# Altium PCB Main_Block.PcbDoc (part 3 of 3)
Units mil, origin at the board's own origin, x right, y up, seen from the top; angles counter-clockwise.
Board outline 1101.34 x 1573.78 mil, 8 copper layers (Top Layer - Signal, L2 - GND, L3-Signal, Layer 3 - Signal, L5 PWR, L6-Signal, L7-GND, Bottom Layer - Signal), stack 62.48 mil thick; 156 components, 137 nets, 799 pads, 431 vias.
Unrouted connection lines stored in the file: 382.
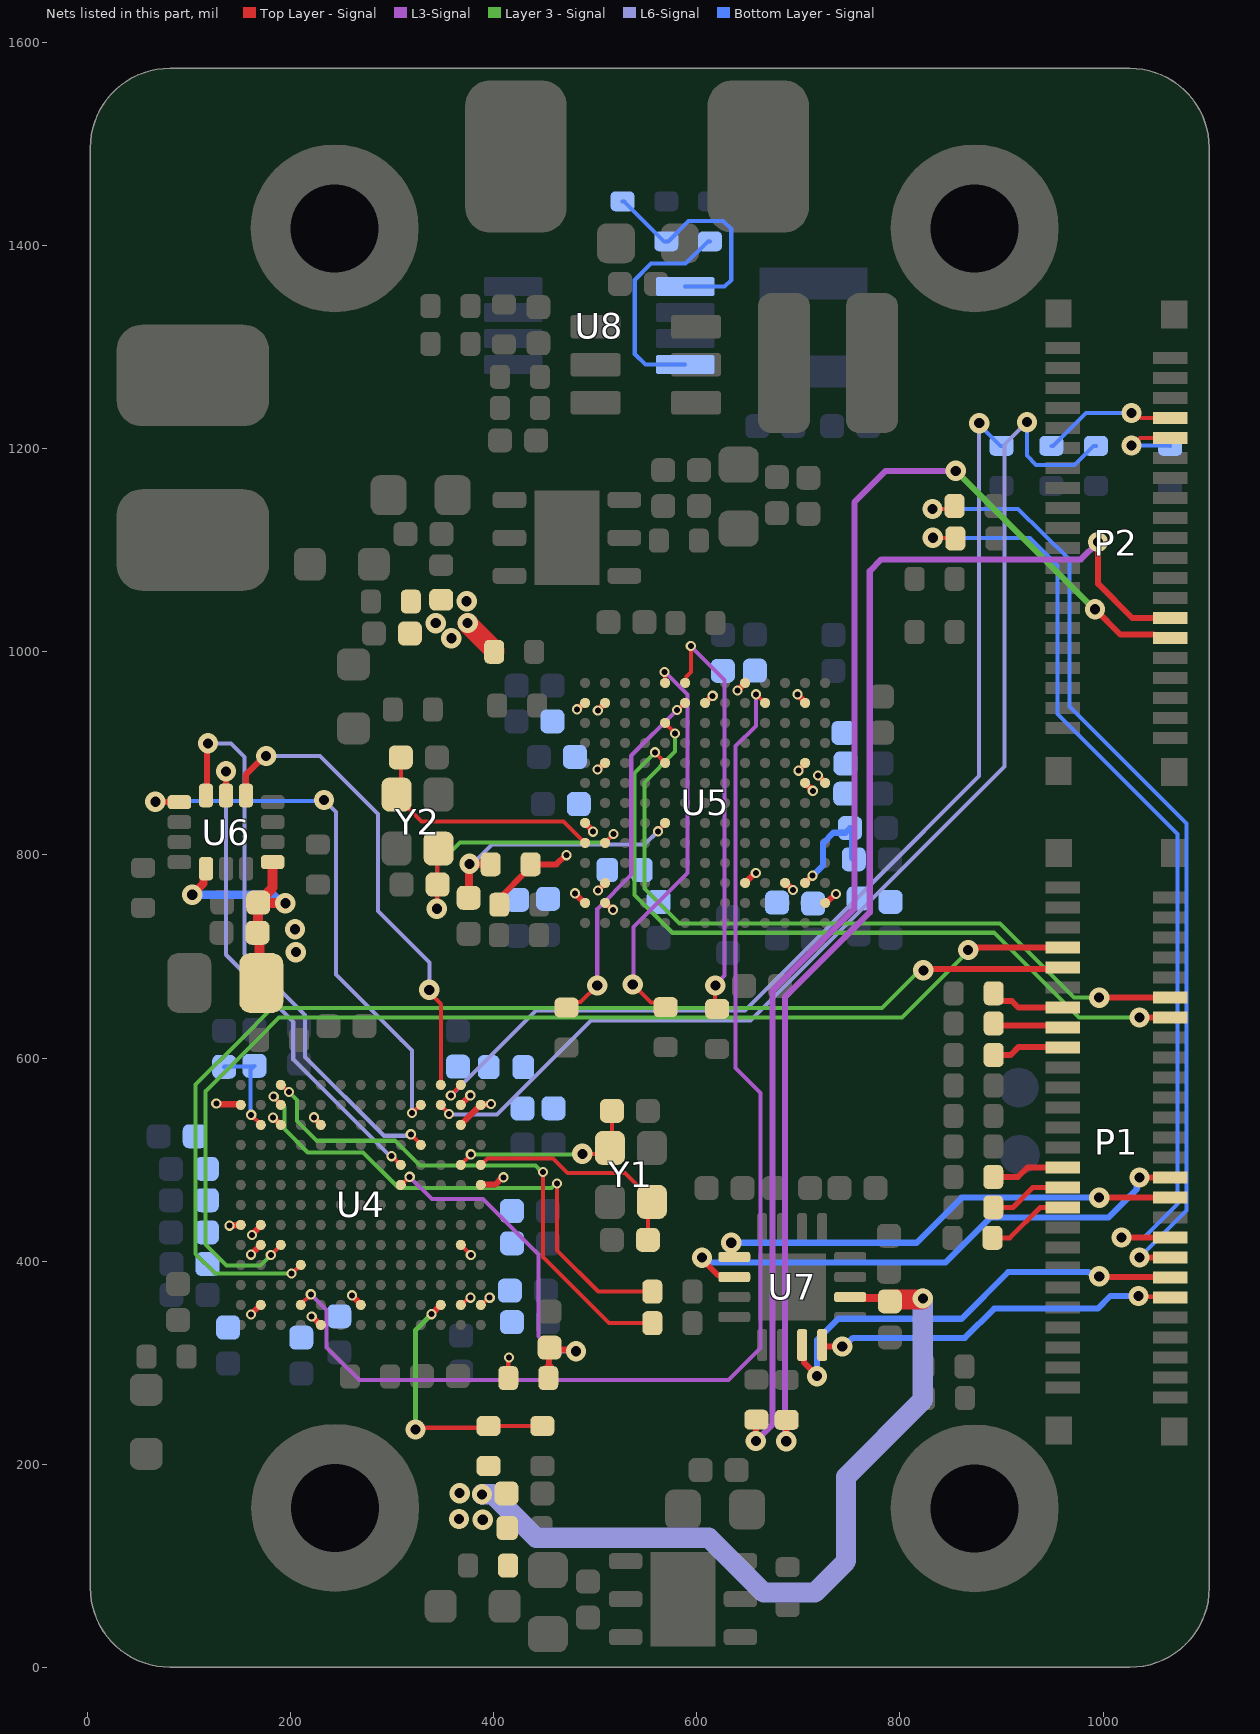
[diagram p9: the nets of this part, all layers, seen from the top]

## Via types
v1: diameter 20, hole 10, Top Layer - Signal to Bottom Layer - Signal, tented both sides, 285 vias
v2: diameter 10, hole 5.91, Top Layer - Signal to Bottom Layer - Signal, tented both sides, 145 vias
v3: diameter 19.68, hole 7.87, Top Layer - Signal to Bottom Layer - Signal, tented both sides, 1 vias

## Nets (pads, with @x,y where several pads share a name; then routed paths per layer and width w, separated by ;. In a path a pad name is that pad's centre, name@x,y a point inside that pad or via, vN(x,y) a via of type N, cw(c..) or ccw(c..) an arc to the next point about the centre after c; other vN are vias at no path point) (continued)
NetR47_1: R47.1 R48.2 U4.B3 | length 259.2
  Top Layer - Signal w4: v1(323.24,234.48) 325,236.24 393.24,236.24 R47.1@395,238 R48.2@448,238
  Top Layer - Signal w6: v2(339,348) U4.B3@348.1,357.15
  Layer 3 - Signal w5: v1(323.24,234.48) 323.24,332.24 v2(339,348)
NetR49_1: R49.1 U8.8 | length 216.7
  Bottom Layer - Signal w4: U8.8@588.65,1282.61 549.39,1282.61 539,1293 539,1366 555,1382 589,1382 611,1404 R49.1@613,1404
NetR50_1: R50.1 R51.2 U8.5 | length 233
  Bottom Layer - Signal w4: R51.2@527,1443.37 528.63,1443.37 568,1404 R50.1@570,1404 571.97,1404 591.97,1424 626,1424 634,1416 634,1366 627.39,1359.39 U8.5@588.65,1359.39
NRST_MCU1: C24.2 R21.1 U4.H5 | length 351.8
  Top Layer - Signal w4: U4.H5@308.73,475.26 309.14,475.26 317.1,483.23 v2(317.51,483.23)
  Top Layer - Signal w6: R21.1@454.53,295.2 454.53,314.45 C24.2@455.19,315.11 457,313.29 479.28,313.29 v1(481.09,311.48)
  Top Layer - Signal w10: R21.1@453.88,285.11 454.53,285.77 R21.1@454.53,295.2
  L3-Signal w4: v2(317.51,483.23) 339.51,461.23 389.66,461.23 444.29,406.61 444.29,326.29 459.09,311.48 v1(481.09,311.48)
NRST_MCU2: C51.2 R33.1 U5.H5 | length 264.5
  Top Layer - Signal w4: v2(561.75,823.33) 561.75,823.87 568.91,831.03 U5.H5@568.91,831.57
  Top Layer - Signal w8: C51.2@375.47,757.85 375.94,758.32 375.94,790.72 v1(376.41,791.2) 396.77,791.2 R33.1@397.15,790.82
  L6-Signal w4: v1(376.41,791.2) 379.47,791.2 398.52,810.24 548.66,810.24 v2(561.75,823.33)
NX_CAN_H: P2.33 R26.2 | length 132.5
  Top Layer - Signal w4: v1(1028,1235) 1032,1235 1037.06,1229.94 P2.33@1066,1229.94
  Bottom Layer - Signal w4: R26.2@949,1202.69 950.69,1202.69 983,1235 v1(1028,1235)
NX_CAN_L: P2.31 R25.2 | length 79.1
  Top Layer - Signal w4: v1(1028,1203) 1029,1203 1036.26,1210.26 P2.31@1066,1210.26
  Bottom Layer - Signal w4: v1(1028,1203) 1028.16,1202.84 1065.84,1202.84 R25.2@1066,1202.69
PH0_MCU1: C41.1 U4.J2 Y1.1 | length 217.5
  Top Layer - Signal w4: U4.J2@367.78,494.94 367.78,495.25 377.62,505.09 v2(377.62,505.39) ; v1(487.47,505.83) 502.17,505.83 504.63,508.29 504.63,523.55 514.01,523.55 516.47,526.01 516.47,535.39 ; Y1.1@514.52,511.68 516.47,513.64 516.47,535.39 ; C41.1@516.47,548.11 516.47,535.39
  Layer 3 - Signal w4: v2(377.62,505.39) 377.7,505.31 463.47,505.31 486.95,505.31 v1(487.47,505.83)
PH0_MCU2: C68.1 U5.J2 Y2.1 | length 301.1
  Top Layer - Signal w4: v1(344.19,747.11) 344.6,747.51 344.6,770.48 C68.1@345,770.88 345,805.36 Y2.1@345.95,806.31 ; U5.J2@509.86,811.89 509.86,812.29 517.92,820.34 v2(517.92,820.74)
  Layer 3 - Signal w4: v1(344.19,747.11) 344.19,789.34 367.2,812.35 427.4,812.35 509.52,812.35 v2(517.92,820.74)
PH1_MCU1: C27.1 U4.J1 Y1.3 | length 229
  Top Layer - Signal w4: U4.J1@387.47,494.94 387.74,494.94 394.12,501.33 424,501.33 458.67,501.33 473.03,486.97 529.39,486.97 555.86,460.5 Y1.3@555.86,458.53 551.91,454.58 C27.1@551.91,421.11
PH1_MCU2: C54.1 U5.J1 Y2.3 | length 244.8
  Top Layer - Signal w4: C54.1@308.76,896.11 308.76,861.63 304.62,857.49 329,833.11 468.95,833.11 U5.J1@490.17,811.89
PWM: P1.15 R41.1 | length 962.6
  Top Layer - Signal w4: v1(831.99,1140.52) 850.88,1140.52 R41.1@853.78,1143.41
  Top Layer - Signal w6: v1(1035.72,403.72) P1.15@1066.1,403.73
  Bottom Layer - Signal w4: v1(831.99,1140.52) 916.04,1140.52 965.81,1091.85 ; 965.83,1091.83 967,1090.66 967,946 1082.19,830.81 1082.19,450.19 v1(1035.72,403.72)
RS232_GB_RX: P1.13 U7.11 | length 450
  Top Layer - Signal w6: U7.11@703.78,317.72 705.7,315.8 705.7,300.28 718.34,287.64 v1(718.34,287.03) ; v1(996.23,385.25) 996.83,384.65 1065.49,384.65 P1.13@1066.1,384.04
  Bottom Layer - Signal w6: v1(718.34,287.03) 718.34,322.44 739.45,343.55 860.63,343.55 906.62,389.54 985.71,389.54 987.33,387.93 993.55,387.93 v1(996.23,385.25)
RS232_GB_TX: P1.11 U7.12 | length 364.6
  Top Layer - Signal w4: v1(1034.82,365.92) 1035.59,365.14 1065.32,365.14 P1.11@1066.1,364.36
  Top Layer - Signal w6: U7.12@723.47,317.72 725.09,316.11 v1(743.19,316.11)
  Bottom Layer - Signal w6: v1(743.19,316.11) 745.14,316.11 753.71,324.67 863.75,324.67 892.61,353.53 994.79,353.53 1007.18,365.92 v1(1034.82,365.92)
RS232_RX: P1.23 U7.6 | length 543
  Top Layer - Signal w6: v1(605.11,403.68) 605.11,402.33 620.95,386.49 634.51,386.49 U7.6@636.69,384.32 ; v1@1035.73,482.46 P1.23@1066.1,482.47
  Bottom Layer - Signal w6: v1(605.11,403.68) 608.9,403.68 613.57,399 845,399 889,443 1005,443 1033.04,471.04 1033.04,479.78 v1(1035.72,482.46)
RS232_TX: P1.21 U7.5 | length 450.5
  Top Layer - Signal w6: P1.21@1066.1,462.78 P1.21@1066.1,462.78 v1@996.06,462.78 ; v1(996.02,462.75) v1@996.06,462.78
  Bottom Layer - Signal w6: v1(634.02,418.35) 816.35,418.35 860.75,462.75 v1(996.02,462.75)
RXD0: P2.13 R35.1 | length 1275.4
  Top Layer - Signal w6: v1(688.11,222.95) 688.34,223.18 688.34,243.75 R35.1@688.57,243.99 ; v1(995.02,1108) 995.02,1066.98 1028.91,1033.09 P2.13@1066,1033.09
  L3-Signal w6: v1(688.11,222.95) 686.83,224.22 686.83,660.04 770.26,743.47 770.26,1079.43 781.82,1091 978.02,1091 v1(995.02,1108)
SBUS: P1.17 R42.1 | length 950.6
  Top Layer - Signal w4: v1(832.41,1112.15) 853.9,1112.15 R42.1@854.57,1111.48
  Top Layer - Signal w6: v1(1018.08,423.43) P1.17@1066.1,423.41
  Bottom Layer - Signal w4: v1(832.41,1112.15) 927.85,1112.15 955,1085 955,938.89 1073.19,820.7 1073.19,456.52 1040.01,423.34 1018.17,423.34 v1(1018.08,423.43)
Shoulder_SCL_IMU1_H: P1.39 U5.E5 | length 740.7
  Top Layer - Signal w4: v2(559.07,901.07) 559.07,900.77 568.91,890.93 U5.E5@568.91,890.63
  Top Layer - Signal w6: v1(1035.73,639.94) P1.39@1066.1,639.95
  Layer 3 - Signal w4: v2(559.07,901.07) 538.86,880.86 538.86,760.49 575.9,723.45 770.28,723.45 892.54,723.45 976.05,639.94 v1(1035.73,639.94)
Shoulder_SDA_IMU1_H: P1.41 U5.C5 | length 741.6
  Top Layer - Signal w4: U5.C5@568.91,930 568.91,929.7 578.76,919.86 v2(578.76,919.55)
  Top Layer - Signal w6: v1(996.02,659.61) 996.06,659.65 P1.41@1066.1,659.65 P1.41@1066.13,659.69
  Layer 3 - Signal w4: v2(578.76,919.55) 578.76,901.68 548.57,871.49 548.57,767.13 583.24,732.45 770.28,732.45 898.43,732.45 971.27,659.61 v1(996.02,659.61)
"Shoulder_TIM1 CH1": P1.20 R11.2 | length 81.4
  Top Layer - Signal w5: R11.2@891.19,423.11 908.19,423.11 938.02,452.94 P1.20@960.19,452.94
"Shoulder_TIM1 CH2": P1.22 R12.2 | length 76.4
  Top Layer - Signal w5: R12.2@891.88,453.11 911.19,453.11 930.71,472.63 P1.22@960.19,472.63
"Shoulder_TIM1 CH3": P1.24 R13.2 | length 72.1
  Top Layer - Signal w6: R13.2@891.88,483.11 916.19,483.11 925.39,492.31 P1.24@960.19,492.31
SPI1_CS: U4.N3 U6.12 | length 477.1
  Top Layer - Signal w4: U6.12@156.4,858.53 U6.12@156.79,858.93 ; v1(336.79,667.22) 336.79,664.38 348.1,653.07 U4.N3@348.1,573.68
  Top Layer - Signal w6: U6.12@156.79,858.93 156.4,859.33 156.4,879.26 174.48,897.35 v1(176.21,897.35)
  Layer 3 - Signal w4: v1@176.21,894.88 v1(176.21,897.35) ; v1@336.46,667.22 v1(336.79,667.22)
  L6-Signal w4: v1(176.21,897.35) 229.23,897.35 286.09,840.49 286.09,744.87 336.79,694.16 v1(336.79,667.22)
SPI1_MISO: U4.M4 U6.1 | length 545
  Top Layer - Signal w4: v2(319.66,546.07) 320.07,546.07 326.77,552.77 U4.M4@326.77,553.68
  Top Layer - Signal w6: v1(67.19,852.35) 67.35,852.19 90.69,852.19 U6.1@90.84,852.03
  L6-Signal w4: v1(233.15,854.03) 245.09,842.09 245.09,682.15 309.68,617.57 319.66,607.59 v2(319.66,546.07)
  Bottom Layer - Signal w4: v1(67.19,852.35) 68.03,853.19 232.31,853.19 v1(233.15,854.03)
SPI1_MOSI: U4.K4 U6.14 | length 565.3
  Top Layer - Signal w4: U6.14@117.03,858.53 U6.14@117.11,858.61 ; v2(318.57,525.07) 318.57,524.77 328.06,515.28 U4.K4@328.06,513.79
  Top Layer - Signal w6: U6.14@117.11,858.61 118.01,859.52 118.01,908.86 v1(119,909.84)
  L6-Signal w4: v1(119,909.84) 141.44,909.84 154.71,896.58 154.71,702.59 214.63,642.67 214.63,617.57 214.63,601.33 292.32,523.64 314.45,523.64 314.74,523.93 317.42,523.93 v2(318.57,525.07)
SPI1_SCK: U4.J5 U6.13 | length 484.3
  Top Layer - Signal w4: U6.13@136.71,858.53 U6.13@136.95,858.77 ; v2(299.49,503.49) 299.83,503.49 308.44,494.89 U4.J5@309.14,494.89
  Top Layer - Signal w6: v1(136.68,882.29) 136.7,859.02 U6.13@136.95,858.77
  L6-Signal w4: v1(136.68,882.29) 136.87,882.09 136.87,701.78 202.88,635.77 202.88,617.57 202.88,598.54 297.93,503.49 v2(299.49,503.49)
SPI3_CS: U4.B10 U5.B10 | length 1201.5
  Top Layer - Signal w4: U4.B10@210.19,357.11 210.19,357.34 220.14,367.29 v2(220.14,367.59) ; v2(658.2,958.12) 658.55,958.12 666.98,949.68 U5.B10@667.34,949.68
  L3-Signal w4: v2(220.14,367.59) 235.58,352.16 235.58,315.3 245.88,305 267.86,283.02 631.08,283.02 662.75,314.69 662.75,565.82 638.19,590.38 638.19,689.26 638.19,907.11 658.2,927.12 v2(658.2,958.12)
SPI3_MISO: R28.2 U5.B6 | length 354
  Top Layer - Signal w4: R28.2@471.81,649.69 477.2,655.07 485.69,655.07 v1(502.09,671.48) ; v2(580.42,942.55) 580.94,942.55 588.08,949.68 U5.B6@588.6,949.68
  L3-Signal w4: v1(502.09,671.48) 502.09,689.26 502.09,746.67 535.52,780.09 535.52,897.64 v2(580.42,942.55)
SPI3_MOSI: R30.2 U5.A5 | length 392.2
  Top Layer - Signal w4: v1(537.09,672.48) 554.78,654.79 564.74,654.79 R30.2@569.39,650.15 ; v2(568.19,980.11) 568.55,979.75 568.55,969.73 U5.A5@568.91,969.37
  L3-Signal w4: v1(537.09,672.48) 537.74,673.12 537.74,689.26 537.74,729.06 590.92,782.24 590.92,957.81 568.62,980.11 v2(568.19,980.11)
SPI3_SCK: R27.2 U5.A6 | length 413.9
  Top Layer - Signal w4: U5.A6@588.6,969.37 589.75,970.52 589.75,975.76 594.16,980.18 v2(594.16,1005.5) ; v1(618.36,671.48) 618.14,671.27 618.14,650.53 618.09,650.48 R27.2@620.09,648.48
  L3-Signal w4: v2(594.16,1005.5) 594.16,1005.38 627.34,972.2 627.34,689.26 627.34,681.55 618.36,672.57 v1(618.36,671.48)
TXD0: P2.11 R34.1 | length 1377.2
  Top Layer - Signal w6: v1(658.19,223.11) 658.42,223.34 658.42,243.92 R34.1@658.65,244.15 ; v1(992.02,1041.9) 1016.92,1017 1050,1017 1050.69,1016.31 1063.09,1016.31 P2.11@1066,1013.41
  L3-Signal w6: v1(658.19,223.11) 674.68,239.6 674.68,666.74 755.09,747.15 755.09,1147.06 786.03,1178 v1(855,1178)
  Layer 3 - Signal w6: v1(855,1178) 991.1,1041.9 v1(992.02,1041.9)
USART1_RX: R37.1 U4.M11 | length 518.9
  Top Layer - Signal w4: v2@183.97,562.62 183.66,562.31 v2(183.66,562.11) 183.66,561.53 190.62,554.58 U4.M11@190.62,554 ; U4.M11@190.62,553.68 U4.M11@191.16,553.68 ; v2(462.34,476.47) 462.34,410.89 463.47,409.76 503.07,370.16 R37.1@556.33,370.16
  Layer 3 - Signal w4: v2(183.66,562.11) 194.27,551.51 194.27,530.11 217.15,507.23 271.64,507.23 306.71,472.16 456.99,472.16 461.31,476.47 v2(462.34,476.47)
USART1_TX: R36.1 U4.N11 | length 524.1
  Top Layer - Signal w4: U4.N11@190.62,573.68 191.16,573.68 198.31,566.53 v2(198.85,566.53) ; v2(448.78,488.02) 448.78,404.07 463.47,389.38 513.67,339.17 R36.1@556.33,339.17
  Layer 3 - Signal w4: v2(198.85,566.53) 206.42,558.96 206.42,538.3 225.99,518.74 303.17,518.74 327.76,494.15 441.29,494.15 447.43,488.02 v2(448.78,488.02)
USART2_RX: R53.2 U4.N2 | length 1044.1
  Top Layer - Signal w4: v2(357.94,563.24) 357.94,563.54 367.78,573.38 U4.N2@367.78,573.68
  L6-Signal w4: v2(357.94,563.24) 441.7,647 647.46,647 689.72,689.26 770.28,769.82 878,877.54 v1(878,1225)
  Bottom Layer - Signal w4: v1(878,1225) 878,1223.86 899.17,1202.69 R53.2@900,1202.69
USART2_TX: R52.2 U4.M3 | length 1162.5
  Top Layer - Signal w4: U4.M3@347.41,554.39 347.41,554.3 356.19,545.51 v2(356.19,545.12)
  L6-Signal w4: v2(356.19,545.12) 356.93,544.38 403.38,544.38 496,637 653,637 903,887 903,1204 v1(925,1226)
  Bottom Layer - Signal w4: v1(925,1226) 925,1193 934,1184 972,1184 990.69,1202.69 R52.2@993,1202.69
VCAP_DSI_MCU1: C19.2 C20.1 U4.L12 | length 93.8
  Top Layer - Signal w4: v2(161.48,544.23) 161.48,544 170.93,534.55 U4.L12@170.93,534.31
  Bottom Layer - Signal w4: C20.1@134.76,591.49 135.26,591.99 162.76,591.99 C19.2@164.26,591.99 ; v2(161.48,544.23) 160.75,544.96 160.75,588.48 C19.2@164.26,591.99 ; C19.2@164.76,592.49 C19.2@164.26,591.99
VCAP_DSI_MCU2: C46.2 C47.1 U5.L12 | length 111.7
  Top Layer - Signal w6: U5.L12@706.71,772.52 706.86,772.52 713.88,779.54 v2(714.03,779.54)
  Bottom Layer - Signal w6: v2(714.03,779.54) 724.4,789.91 724.4,811.7 734.58,821.88 746.33,821.88 C47.1@750.9,826.45 752.74,824.61 752.74,797.44 C46.2@754.57,795.6
VDD_MCU1: C15.1 C22.1 C23.1 C25.1 C26.1 C28.1 C29.1 C30.1 C32.1 C33.1 C34.1 C35.1 C36.1 C37.1 C69.1 C70.1 C72.1 C76.1 FB1.2 FB3.2 R7.2 R21.2 R47.2 U4.A9 U4.B1 U4.B2 U4.B7 U4.B12 U4.E2 U4.E12 U4.F12 U4.F13 U4.H1 U4.L9 U4.L11 U4.M2 U4.M13 U6.5 U6.8 U7.14 | length 1274.4
  Top Layer - Signal w4: v2(140.19,435.11) v2@140.58,435.5 ; U4.F13@150.86,435.5 U4.F13@151.25,435.89 ; v2(183.07,541.42) v2@183.29,541.42 ; U4.L11@190.4,534.31 U4.L11@190.62,534.31 ; U4.B2@367.4,355.68 367.51,355.68 376.05,364.23 v2(377.24,364.23) ; U4.E2@367.78,416.2 v2(377.62,406.36) ; U4.B1@386.4,355.68 386.85,355.68 395.39,364.23 v2(396.24,364.23) ; R21.2@414.51,285.11 414.51,304.89 v2(415.09,305.48)
  Top Layer - Signal w6: v2(127.15,555.27) 127.78,554.63 150.61,554.63 U4.M13@151.25,554 ; v2@140.58,435.5 U4.F13@150.86,435.5 ; v2(161.14,347.69) U4.B12@170.99,357.53 ; v2(161.25,406.58) U4.E12@171.1,416.42 ; v2(162.24,425.98) U4.F12@172.09,435.82 ; v2@183.29,541.42 U4.L11@190.4,534.31 ; v2(221.06,345.83) 221.34,345.83 230.91,336.26 U4.A9@230.91,336.2 ; v2(223.23,541.81) 223.23,541.44 229.52,535.15 U4.L9@229.52,534.31 ; v2(260.57,366.58) U4.B7@270.41,356.74 ; U4.M2@367.25,553.59 v2(377.09,563.43) ; U4.H1@387.44,474.9 388.14,475.6 401.47,475.6 408.64,482.78 v2(409.73,482.78)
  Top Layer - Signal w8: v1(103.48,760.84) 114.67,772.03 114.67,784.12 U6.5@117.03,786.48 ; U7.14@750.94,364.88 751.8,364.02 779.72,364.02 782.16,361.58 C72.1@785.94,361.58 ; C72.1@790.15,360.56 C72.1@790.65,361.06
  Top Layer - Signal w10: C70.1@171.33,677.49 169.52,679.3 169.52,721.57 C69.1@167.7,723.39 168.04,723.73 168.04,752.81 C76.1@168.39,753.15 ; U6.8@182.58,792.98 182.58,767.83 168.39,753.64 C76.1@168.39,753.15 ; v1(195.09,752.48) 194.76,752.82 168.72,752.82 C76.1@168.39,753.15
  Top Layer - Signal w20: C72.1@791.96,360.33 791.96,362.37 821.55,362.37 v1(822.54,363.36)
  L6-Signal w20: v1(388.56,170.63) 399.37,170.63 442,128 612,128 666,74 716,74 747,105 747,188 822.54,263.54 v1(822.54,363.36)
  Bottom Layer - Signal w8: v1(103.48,760.84) 183.48,760.84 191.85,752.48 v1(195.09,752.48)
  other v1: 365.93,146.38 389.37,145.7 366.61,171.85 205.48,704.32 204.55,726.89
VDD_MCU2: C42.1 C49.1 C50.1 C52.1 C53.1 C57.1 C58.1 C59.1 C60.1 C61.1 C63.1 C64.1 C66.1 C67.1 FB2.2 FB4.2 R8.2 R33.2 R39.2 R45.2 U5.A9 U5.B1 U5.B2 U5.B7 U5.B12 U5.E2 U5.E12 U5.F12 U5.F13 U5.H1 U5.L9 U5.L11 U5.M2 U5.M13 | length 287.8
  Top Layer - Signal w6: R39.2@402.41,751.48 402.41,754.1 436.52,788.2 R33.2@436.52,790.82 436.69,790.65 461.76,790.65 470.85,799.74 v2(471.94,799.74) ; v2(482.05,943.34) 482.94,943.34 489.28,949.68 U5.B1@490.17,949.68 ; U5.H1@490.17,832.21 490.17,831.15 498.05,823.28 v2(498.05,822.86) ; v2(502.2,884.02) 502.72,884.02 508.39,889.68 U5.E2@509.86,889.68 ; v2(502.65,942.33) 502.65,942.4 509.86,949.61 U5.B2@509.86,949.68 ; U5.M2@511.19,752.11 511.19,751.98 517.12,746.05 v2(517.6,746.05) ; U5.B7@608.28,949.68 608.49,949.68 615.48,956.68 v2(615.69,956.68) ; v2@640.26,962 U5.A9@647.63,969.37 ; U5.L9@647.65,772.52 647.96,772.52 657.8,782.36 v2(658.1,782.36) ; U5.L11@687.03,772.52 687.49,772.52 694.45,765.56 v2(694.92,765.56) ; v2(699.21,958.15) 699.21,957.67 706.71,950.16 U5.B12@706.71,949.68 ; v2(700.17,882.94) 700.17,883.52 706.71,890.06 U5.E12@706.71,890.63 ; U5.F12@706.71,870.94 706.71,870.78 714.2,863.29 v2(714.2,863.12) ; v2(719.48,878.05) 719.48,877.95 726.4,871.04 U5.F13@726.4,870.94 ; U5.M13@726.4,752.83 727.42,752.83 736.07,761.48 v2(737.09,761.48)
  Top Layer - Signal w20: v1(374.5,1028.33) 374.5,1027.79 400.63,1001.65 R45.2@400.63,1000
  other v1: 358.47,1013.28 343.1,1028.17 373.52,1049.69
  other v2: 640.24,962
VDDA_MCU1: C39.1 C40.1 FB1.1 U4.L2 U4.M1 | length 38.2
  Top Layer - Signal w6: U4.L2@367.78,534.31 387.91,554.44 396.98,554.44 v2(397.42,554.88)
VDDA_MCU2: C55.1 C56.1 FB2.1 U5.L2 U5.M1 | length 24.7
  Top Layer - Signal w6: v2(480.35,762.25) 480.35,761.95 490.19,752.11 U5.M1@490.19,751.81 ; v2(502.78,764.96) 502.78,765.2 508.98,771.41 U5.L2@510.2,771.41
Wrist_SCL_MAG_H: P1.44 U4.D10 | length 1183.4
  Top Layer - Signal w4: v2(201.24,388.19) 201.6,388.19 209.94,396.52 U4.D10@210.3,396.52 ; P1.44@959.46,689.91 P1.44@960.19,689.18
  Top Layer - Signal w6: v1(823.09,686.37) 824.49,687.78 957.32,687.78 P1.44@959.46,689.91
  Layer 3 - Signal w4: v2(201.24,388.19) 126.11,388.19 107.36,406.94 106.62,407.68 106.62,573.9 107.36,574.63 150.3,617.57 182.13,649.4 782.52,649.4 819.49,686.37 v1(823.09,686.37)
Wrist_SDA_MAG_H: P1.46 U4.E11 | length 1144.7
  Top Layer - Signal w4: v2(180.77,406.36) U4.E11@190.62,416.2
  Top Layer - Signal w6: v1(867.13,706.45) 869.54,708.86 P1.46@960.19,708.86
  Layer 3 - Signal w4: v2(180.77,406.36) 170.49,396.08 137.22,396.08 116.49,416.81 116.49,567.41 166.65,617.57 188.93,639.85 801.89,639.85 867.13,705.1 v1(867.13,706.45)
Wrist_TIM3_CH1: P1.36 R14.1 | length 71.5
  Top Layer - Signal w6: R14.1@892.27,603.11 908.99,603.11 916.99,611.11 959.5,611.11 P1.36@960.19,610.42
Wrist_TIM3_CH2: P1.38 R15.1 | length 69.6
  Top Layer - Signal w6: R15.1@892.27,634.12 894.28,632.12 958.18,632.12 P1.38@960.19,630.11
Wrist_TIM3_CH3: P1.40 R16.1 | length 74.3
  Top Layer - Signal w6: R16.1@892.27,663.84 892.27,662.91 898.97,656.21 910.28,656.21 916.71,649.79 P1.40@960.19,649.79
pads on no net: P2.2 P2.4 P2.6 P2.8 P2.10 P2.12 P2.14 P2.16 P2.18 P2.20 P2.21 P2.22 P2.23 P2.24 P2.25 P2.26 P2.28 P2.29 P2.30 P2.32 P2.34 P2.36 P2.37 P2.38 P2.40 U2.4 U3.4 U4.A2 U4.A8 U4.A10 U4.A13 U4.B8 U4.C1 U4.C2 U4.C3 U4.C4 U4.C6 U4.C7 U4.C8 U4.C11 U4.D2 U4.D3 U4.D4 U4.D5 U4.D6 U4.D7 U4.D8 U4.D11 U4.D12 U4.D13 U4.E1 U4.E3 U4.E4 U4.E6 U4.E7 U4.E9 U4.F6 U4.F7 U4.F8 U4.F9 U4.G1 U4.G2 U4.G3 U4.G4 U4.G5 U4.G6 U4.G7 U4.G8 U4.G9 U4.G10 U4.G11 U4.H3 U4.H4 U4.H6 U4.H7 U4.H10 U4.H12 U4.H13 U4.J3 U4.J4 U4.J6 U4.J7 U4.J8 U4.J12 U4.J13 U4.K1 U4.K2 U4.K5 U4.K6 U4.K7 U4.K8 U4.K9 U4.K10 U4.K12 U4.K13 U4.L4 U4.L5 U4.L6 U4.L7 U4.L8 U4.L10 U4.M5 U4.M8 U4.M10 U4.M12 U4.N4 U4.N8 U4.N13 U5.A2 U5.A8 U5.A10 U5.A13 U5.B8 U5.C1 U5.C2 U5.C3 U5.C4 U5.C6 U5.C7 U5.C8 U5.C9 U5.C10 U5.C11 U5.D2 U5.D3 U5.D4 U5.D5 U5.D6 U5.D7 U5.D8 U5.D9 U5.D11 U5.D12 U5.D13 U5.E1 U5.E4 U5.E6 U5.E7 U5.E8 U5.E9 U5.E10 U5.F6 U5.F7 U5.F8 U5.F9 U5.F10 U5.F11 U5.G1 U5.G2 U5.G3 U5.G4 U5.G5 U5.G6 U5.G7 U5.G8 U5.G9 U5.G10 U5.G11 U5.H3 U5.H4 U5.H6 U5.H7 U5.H8 U5.H9 U5.H10 U5.H12 U5.H13 U5.J3 U5.J4 U5.J5 U5.J6 U5.J7 U5.J8 U5.J9 U5.J10 U5.J12 U5.J13 U5.K1 U5.K2 U5.K3 U5.K4 U5.K5 U5.K6 U5.K7 U5.K8 U5.K9 U5.K10 U5.K12 U5.K13 U5.L3 U5.L4 U5.L5 U5.L6 U5.L7 U5.L8 U5.L10 U5.M3 U5.M4 U5.M5 U5.M8 U5.M10 U5.M11 U5.M12 U5.N3 U5.N4 U5.N6 U5.N7 U5.N8 U5.N11 U5.N12 U5.N13

## Polygon pours and split planes (outlines as drawn)
VDD_MCU1 on Top Layer - Signal "VDD_MCU1_L01_P019" (solid, remove dead copper, pour order 19): 421.02,85.35 407.57,85.35 402.28,90.65 402.28,110.1 384.27,128.11 363.45,128.11 355.19,136.37 355.19,195.19 368.47,208.47 425.83,208.47 425.83,90.16
12V on Top Layer - Signal "12V_L01_P029" (solid, remove dead copper, pour order 29): 3.12,1182.48 193.24,1182.48 193.24,1034.48 3.12,1034.48
GND on Top Layer - Signal "GND_L01_P036" (solid, remove dead copper, pour order 36): 78.09,719.48 78.09,651.81 78.09,600.48 91.09,587.48 116.09,587.48 126.09,597.48 126.09,644.48 143.98,662.37 143.98,764.91 123.73,765.11 118.35,759.74 118.35,741.74 110.09,733.48 92.09,733.48
VDD_MCU1 on Top Layer - Signal "VDD_MCU1_L01_P015" (solid, remove dead copper, pour order 15): 212.09,751.05 212.09,737.12 223.78,725.43 223.78,716.09 223.78,686.5 214.77,677.49 192.99,677.49 192.99,653.28 187.14,647.44 156.21,647.44 150.1,653.55 150.1,728.21 150.1,755.25 160.13,765.28 169.03,765.28 169.03,796.24 173.01,800.22 192.02,800.22 196.25,795.99 196.25,766.89
GND on Top Layer - Signal "GND_L01_P028" (solid, remove dead copper, pour order 28): 387.59,1361.98 452.91,1361.98 467.38,1347.5 532.7,1347.5 538.9,1353.71 538.9,1566.93 35.13,1566.93 3.12,1534.92 3.12,1209.48 347.66,1209.48 347.66,1361.98 263.92,1361.98
+5V_SYS on Top Layer - Signal "+5V_SYS_L01_P010" (solid, remove dead copper, pour order 10): 628.66,206.91 670.39,206.91 703.27,174.03 703.27,90.65 699.25,86.63 634.37,86.63 625.2,95.79 625.2,203.45
12V on Top Layer - Signal "12V_L01_P004" (solid, remove dead copper, pour order 4): 624.4,1310.6 624.4,1331.58 624.4,1379.32 652.19,1407.11 1098.43,1407.11 1098.43,1523.62 1055.12,1566.93 546.19,1566.93 546.19,1318.38 556.28,1308.3 622.1,1308.3
GND on Top Layer - Signal "GND_L01_P022" (solid, remove dead copper, pour order 22): 398.85,1066.83 432.32,1066.83 440.2,1058.95 440.2,1022.1 445.91,1016.39 521.88,1016.39 525.68,1020.19 525.68,1044.06 518.62,1051.11 504.18,1065.55 504.18,1157.42 509.8,1163.05 662.36,1163.05 665.45,1159.96 725.26,1159.96 725.17,1196.3 717.26,1204.19 646.72,1204.19 628.17,1222.73 628.17,1252.7 628.43,1252.96 622.49,1258.89 578.53,1258.89 569.19,1249.56 569.19,1226.58 533.09,1190.48 458.52,1190.48 440.2,1172.16 440.2,1088.06 434.59,1082.45 402.08,1082.45 398.85,1079.21
GND on Top Layer - Signal "GND_L01_P021" (solid, remove dead copper, pour order 21): 618.84,0.48 618.84,199.66 611.39,207.11 443.19,207.11 435.78,199.7 435.78,163.27 439.76,159.29 540.12,159.29 554.6,144.81 554.6,54.82 545.81,46.04 516.44,46.04 501.66,60.81 436.83,60.81 420.94,76.7 399.4,76.7 395.14,72.44 395.14,0.48
NetC9_1 on Top Layer - Signal "NETC9_1_L01_P011" (solid, remove dead copper, pour order 11): 544.53,59.68 512.29,59.68 500.73,71.24 444.33,71.24 433.18,82.39 433.18,149.24 436.32,152.39 461.44,152.39 464.76,149.06 464.76,123.28 475.22,112.83 544.17,112.83 548.64,108.36 548.64,63.79
VDD_MCU2 on Top Layer - Signal "VDD_MCU2_L01_P007" (solid, remove dead copper, pour order 7): 303.19,1055.84 303.19,1009.01 309.09,1003.11 375.19,1003.11 388.19,1016.11 388.19,1051.11 375.18,1064.12 311.47,1064.12
NetC13_1 on Top Layer - Signal "NETC13_1_L01_P005" (solid, remove dead copper, pour order 5): 374.81,1177.11 390.65,1161.27 426.73,1161.27 432.23,1155.76 432.23,1105.43 427.86,1101.05 376.41,1101.05 363.56,1088.21 363.56,1074.46 359.59,1070.49 339.49,1070.49 334.24,1075.74 334.24,1164.07 347.28,1177.11
+5V_SYS on Top Layer - Signal "+5V_SYS_L01_P003" (solid, remove dead copper, pour order 3): 746.91,1345.51 746.91,1160.1 733.14,1146.33 631.7,1146.33 620.9,1157.13 515.19,1157.13 512.15,1154.08 512.15,1135.85 517,1131 579.92,1131 587.47,1123.46 587.47,1100.56 608.47,1079.55 777.17,1079.55 799.69,1102.07 799.69,1343.91 790.59,1353.01 754.4,1353.01
NetC1_2 on Top Layer - Signal "NETC1_2_L01_P000" (solid, remove dead copper, pour order 0): 633.05,1296.08 577.17,1296.08 572.69,1291.6 572.69,1273.8 577.53,1268.96 625.73,1268.96 650.19,1244.5 650.19,1228.11 663.09,1215.21 703.98,1215.21 711.47,1222.71 711.47,1345.51 700.48,1356.51 666.29,1356.51 652.45,1342.68 652.45,1315.49
VDD_MCU1 on Bottom Layer - Signal "VDD_MCU1_L08_P023" (solid, remove dead copper, pour order 23): 374.33,606.92 408.97,641.57 528.01,641.57 552.45,617.13 552.45,576.83 544.09,568.48 527.09,568.48 519.84,575.73 519.84,600.73 510.78,609.79 420.38,609.79 410.15,599.57 410.15,581.82 406.23,577.89 391.78,577.89 385.65,571.77 385.65,523.65 433.19,476.11 433.19,223.11 400.19,190.11 400.19,141.83 392.96,134.75 350.69,135.61 346.19,140.11 346.19,227.11 389.19,270.11 389.19,300.72 380.99,308.92 346.32,308.92 326.79,328.45 236.95,328.45 224.49,315.99 219.2,310.7 190.6,310.7 183.29,318.01 175.71,325.59 158.25,325.59 151.81,319.15 111.49,319.15 105.19,325.46 105.19,509.46 103.04,511.62 96.31,511.62 90.92,517.01 90.92,559 100.03,568.11 138.6,568.11 148.19,558.52 148.19,540.11 152.69,535.61 165.12,535.61 169.81,540.3 169.81,568.99 188.19,587.37 188.19,596.77 198.34,606.92 226.54,606.92 239.19,619.58 239.19,661.11 219.19,681.11 195.84,681.11 182.33,694.62 182.33,724.44 198.5,740.62 261.4,740.62 309.73,692.28 309.73,641.57 344.38,606.92
VDD_MCU2 on Bottom Layer - Signal "VDD_MCU2_L08_P018" (solid, remove dead copper, pour order 18): 464.21,819.2 464.09,819.08 464.09,798.57 469.14,793.52 486.28,793.52 491.09,798.33 497.36,804.6 524.48,804.6 533.14,795.95 533.14,768.98 511.12,746.97 511.12,738.81 515.41,734.52 543.97,734.52 591.39,734.52 599.76,726.15 657.84,726.15 672.24,740.56 801.69,740.56 805.38,744.25 805.38,764.96 798.9,771.45 714.45,771.45 709.88,776.02 709.88,813.26 740.92,844.31 755.66,844.31 760.58,849.23 760.58,980.95 745.36,996.18 565.12,996.18 500.49,1060.81 338.39,1060.81 330.19,1052.61 330.19,1011.81 339.89,1002.11 436.19,1002.11 443.84,994.46 443.84,918.34 448.82,913.36 464.21,913.36
GND on Bottom Layer - Signal "GND_L08_P024" (solid, remove dead copper, pour order 24): 612.09,208.48 619.09,201.48 619.09,0.48 44.54,0.48 3.12,41.9 3.12,666.43 3.51,666.82 214.76,666.82 228.09,653.48 228.09,624.48 216.45,612.84 124.52,612.84 84.84,572.48 84.84,511.54 96.97,499.41 96.97,333.68 118.05,312.6 171.82,312.6 179.61,304.81 221.49,304.81 240.96,324.28 321.45,324.28 342.58,303.14 377.55,303.14 380.89,299.8 380.89,277.86 357.64,254.61 193.92,254.61 149.17,209.85 149.17,107.32 186.01,70.48 366.09,70.48 437.02,141.4 437.02,479.94 395.16,521.79 395.16,532.37 469.98,532.37 496.52,558.91 598.67,558.91 627.09,530.48 627.09,450.48 561.09,384.48 561.09,259.48
GND on Bottom Layer - Signal "GND_L08_P048" (solid, pour order 48): 498,1430 493,1435 398,1435 390.42,1427.42 390.42,1351.32 391.8,1349.94 466.94,1349.94 498,1381
GND on Bottom Layer - Signal "GND_L08_P047" (solid, pour order 47): 448.29,1290.68 446.91,1292.06 334.06,1292.06 325,1283 325,1268 334,1259 432.74,1259 448.29,1274.55
+5V_SYS on Bottom Layer - Signal "NONET_L-01_P-001" (solid, pour order 46): 350,1409 359,1400 359,1370 385.76,1343.24 446.91,1343.24 448.29,1341.86 448.29,1300.14 446.91,1298.76 370.24,1298.76 332,1337 332,1400 341,1409
1V8 on Bottom Layer - Signal "1V8_L08_P045" (solid, pour order 45): 830,1291.44 661.85,1291.44 661.85,1255.15 683.19,1233.81 683.19,1213.65 686.65,1210.19 741.64,1210.19 745.09,1213.65 745.09,1233.09 751.08,1241 796.43,1241 804.72,1233.39 805.17,1210.19 830,1210.19
GND on Bottom Layer - Signal "GND_L08_P027" (solid, remove dead copper, pour order 27): 611.72,1015.04 611.72,1006.03 611.72,1001.31 616.44,1001.31 749.15,1001.31 770.6,979.85 770.6,790.45 783.47,777.58 804.51,777.58 813.44,768.65 813.44,741.97 805.85,734.37 675.6,734.37 659.36,718.13 595.91,718.13 585.32,728.73 509.23,728.73 504.9,733.05 414.06,733.05 400.16,746.96 400.16,776.39 424.34,800.57 442.05,800.57 460.03,818.55 460.03,899.46 451.1,908.38 438.77,908.38 436.84,910.32 436.84,974.05 422.11,988.77 348.38,988.77 290.09,930.49 290.09,720.77 324.38,686.48 800.09,686.48 854.09,740.48 854.09,975.48 757.09,1072.48 604.09,1072.48 523.09,1153.48 449.95,1153.48 430.09,1133.62 430.09,1097.48 454.09,1073.48 503.09,1073.48 557.63,1018.95 607.81,1018.95
VDDA_MCU1 on Bottom Layer - Signal "VDDA_MCU1_L08_P020" (solid, remove dead copper, pour order 20): 421.86,603.37 436.69,603.37 440.37,599.69 440.37,578.93 450.95,568.35 465.16,568.35 473.34,560.17 473.34,544.16 467.65,538.47 396.74,538.47 392.38,542.83 392.38,555.79 396.29,559.7 409.43,559.7 418.38,568.65 418.38,599.89
VDDA_MCU2 on Bottom Layer - Signal "VDDA_MCU2_L08_P017" (solid, remove dead copper, pour order 17): 409.67,748.22 409.67,766.93 418.36,775.62 498.05,775.62 498.05,792.09 503.46,797.5 521.11,797.5 527.06,791.54 527.06,772.34 503.05,748.33 474.15,748.33 466.94,741.11 416.78,741.11
1V8 on L5 PWR "1V8_L05_P049" (solid, pour order 49): 354.92,327 327,327 340.71,301
+5V_SYS on L5 PWR "+5V_SYS_L05_P033" (solid, remove dead copper, pour order 33): 418.09,610.48 3.12,610.48 3.12,42.45 45.09,0.48 548.09,0.48 1065.1,0.48 1104.46,39.84 1104.46,1231.48 597.09,1231.48 548.09,1182.48 548.09,740.48
12V on L5 PWR "12V_L05_P031" (solid, remove dead copper, pour order 31): 414.09,645.48 513,744.39 513,1192.39 593.09,1272.48 1104.46,1272.48 1104.46,1532.82 1062.93,1574.3 44.88,1573.16 3.12,1531.35 3.12,645.48
+5V_SYS on Top 3D Body "+5V_SYS_L08_P044" (solid, pour order 44): 446.08,1344.07 378.93,1344.07 358,1365 358,1404 353,1409 337,1409 332,1404 332,1353 387.36,1297.64 445.79,1297.64 449.29,1301.14 449.29,1340.86
GND on L6-Signal "GND_L06_P042" (solid, remove dead copper, pour order 42): -16.91,1597.48 -16.91,1599.48 1148.09,1599.48 1148.09,-78.52 -25.91,-78.52 -25.91,-59.52
+5V_SYS on L6-Signal "+5V_SYS_L06_P043" (solid, pour order 43): 733,1125 747,1111 747,1091 735,1079 633,1079 627,1085 627,1125 634,1132 648,1132 655,1125
GND on L2 - GND "GND_L02_P034" (solid, remove dead copper, pour order 34): 3.12,1574.38 1120.33,1574.38 1122.05,1572.66 1122.05,0.48 3.12,0.48
GND on L7-GND "GND_L07_P035" (solid, remove dead copper, pour order 35): -63.91,1631.48 -63.91,27.48 43.09,-79.52 49.09,-73.52 1211.09,-73.52 1211.09,1595.48 1175.09,1631.48
GND on L3-Signal "GND_L03_P040" (solid, remove dead copper, pour order 40): -53.91,1588.48 1131.09,1588.48 1131.09,-65.52 -55.91,-65.52 -55.91,-43.52
GND on Layer 3 - Signal "GND_L04_P041" (solid, remove dead copper, pour order 41): -58.91,1605.48 -58.91,1603.48 1116.09,1603.48 1116.09,-108.52 -65.91,-108.52 -65.91,-100.52

## Keep-outs
Keep-Out Layer:
  lines w0.5: 3.12,78.72 ccw(c81.35,78.72) 81.35,0.48 1026.23,0.48 ccw(c1026.23,78.72) 1104.46,78.72 1104.46,1496.03 ccw(c1026.23,1496.03) 1026.23,1574.26 81.35,1574.26 ccw(c81.35,1496.03) 3.12,1496.03 3.12,78.72
  lines w4: 3.12,78.72 ccw(c81.35,78.72) 81.35,0.48 1026.23,0.48 ccw(c1026.23,78.72) 1104.46,78.72 1104.46,1496.03 ccw(c1026.23,1496.03) 1026.23,1574.26 81.35,1574.26 ccw(c81.35,1496.03) 3.12,1496.03 3.12,78.72

## Silkscreen, mask and mechanical layers (free items; w line width, h text height)
Top Overlay:
  text "12V" at 807,1558 h60 r180
  text "GND" at 364,1556.36 h60 r180
  text "GND" at 19,1450 h60 r270
  text "Main to Cam" at 1016.62,1374 h35 r90
  text "12V" at 21,1051 h60 r270
  text "Wrist to Main" at 1018.72,10.48 h35 r90
Bottom Overlay:
  drawing of 427 lines, arcs and shapes, not listed
  text "Omnisight main block Cam / v2.0          2026 / eal-time Robotics ®" at 561,999 h60